# Altium PCB RemoteCar_V1.0.PcbDoc
Units mil, origin at the board's own origin, x right, y up, seen from the top; angles counter-clockwise.
Board outline 3818.9 x 2283.46 mil, 2 copper layers (Top Layer, Bottom Layer); 61 components, 56 nets, 230 pads, 12 vias.
Unrouted connection lines stored in the file: 66.
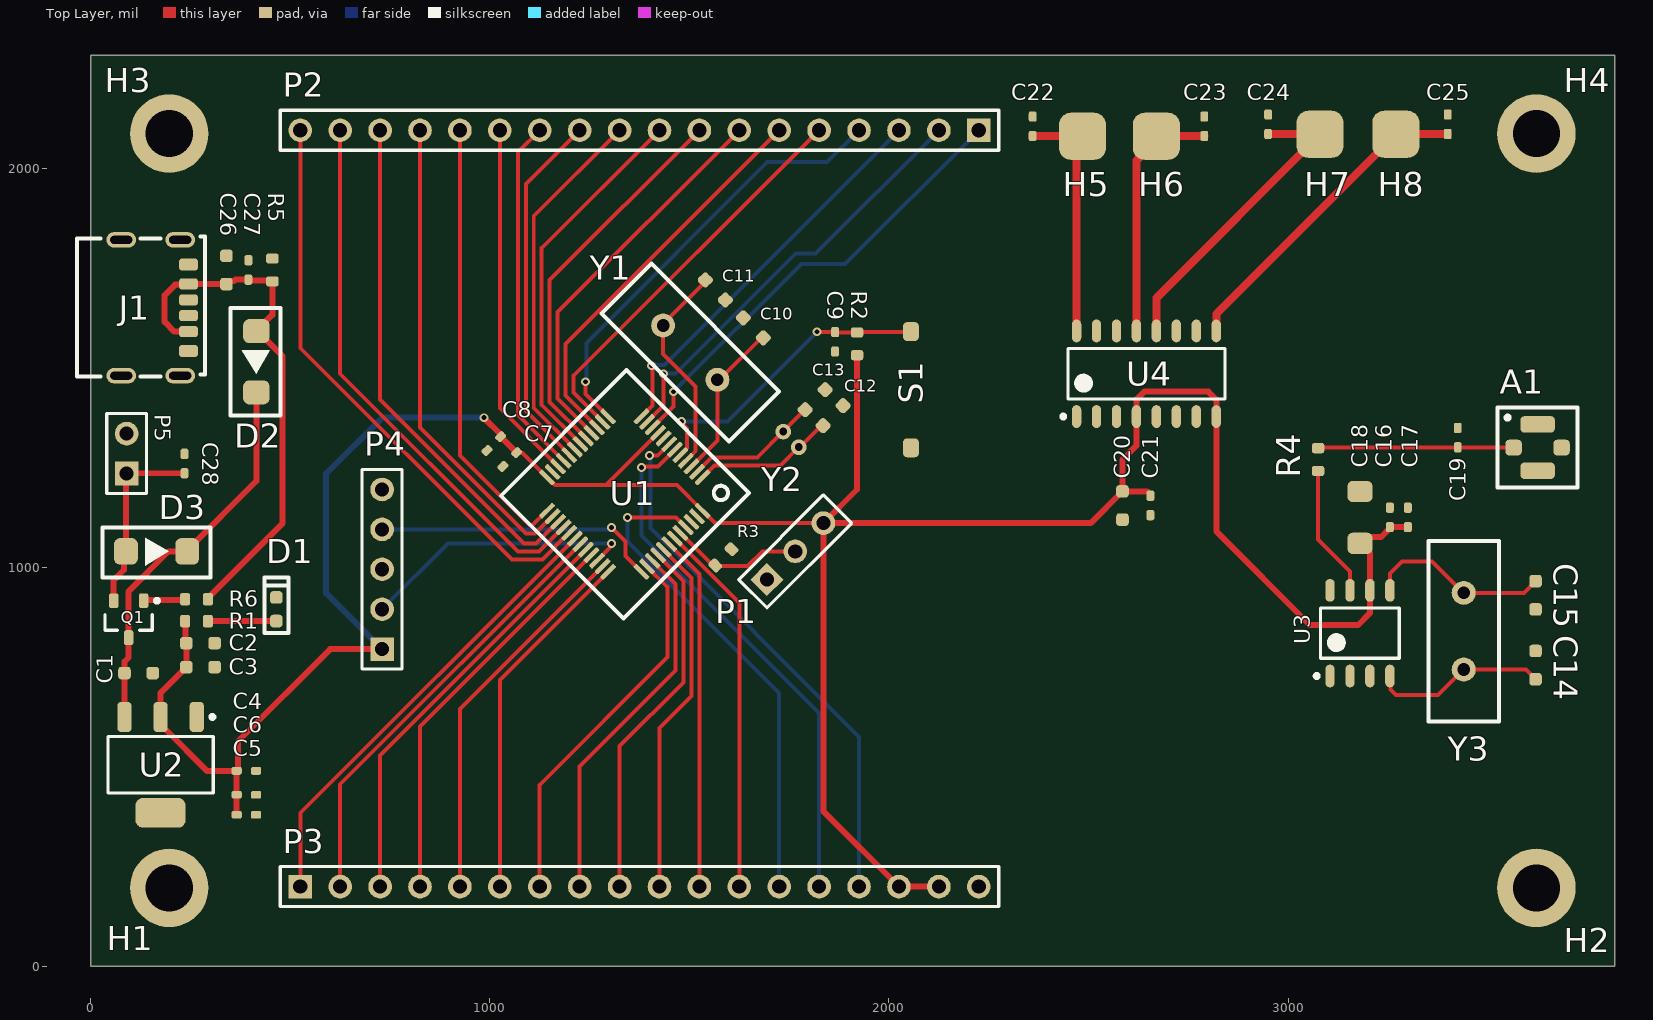
[diagram p0: Top Layer view]
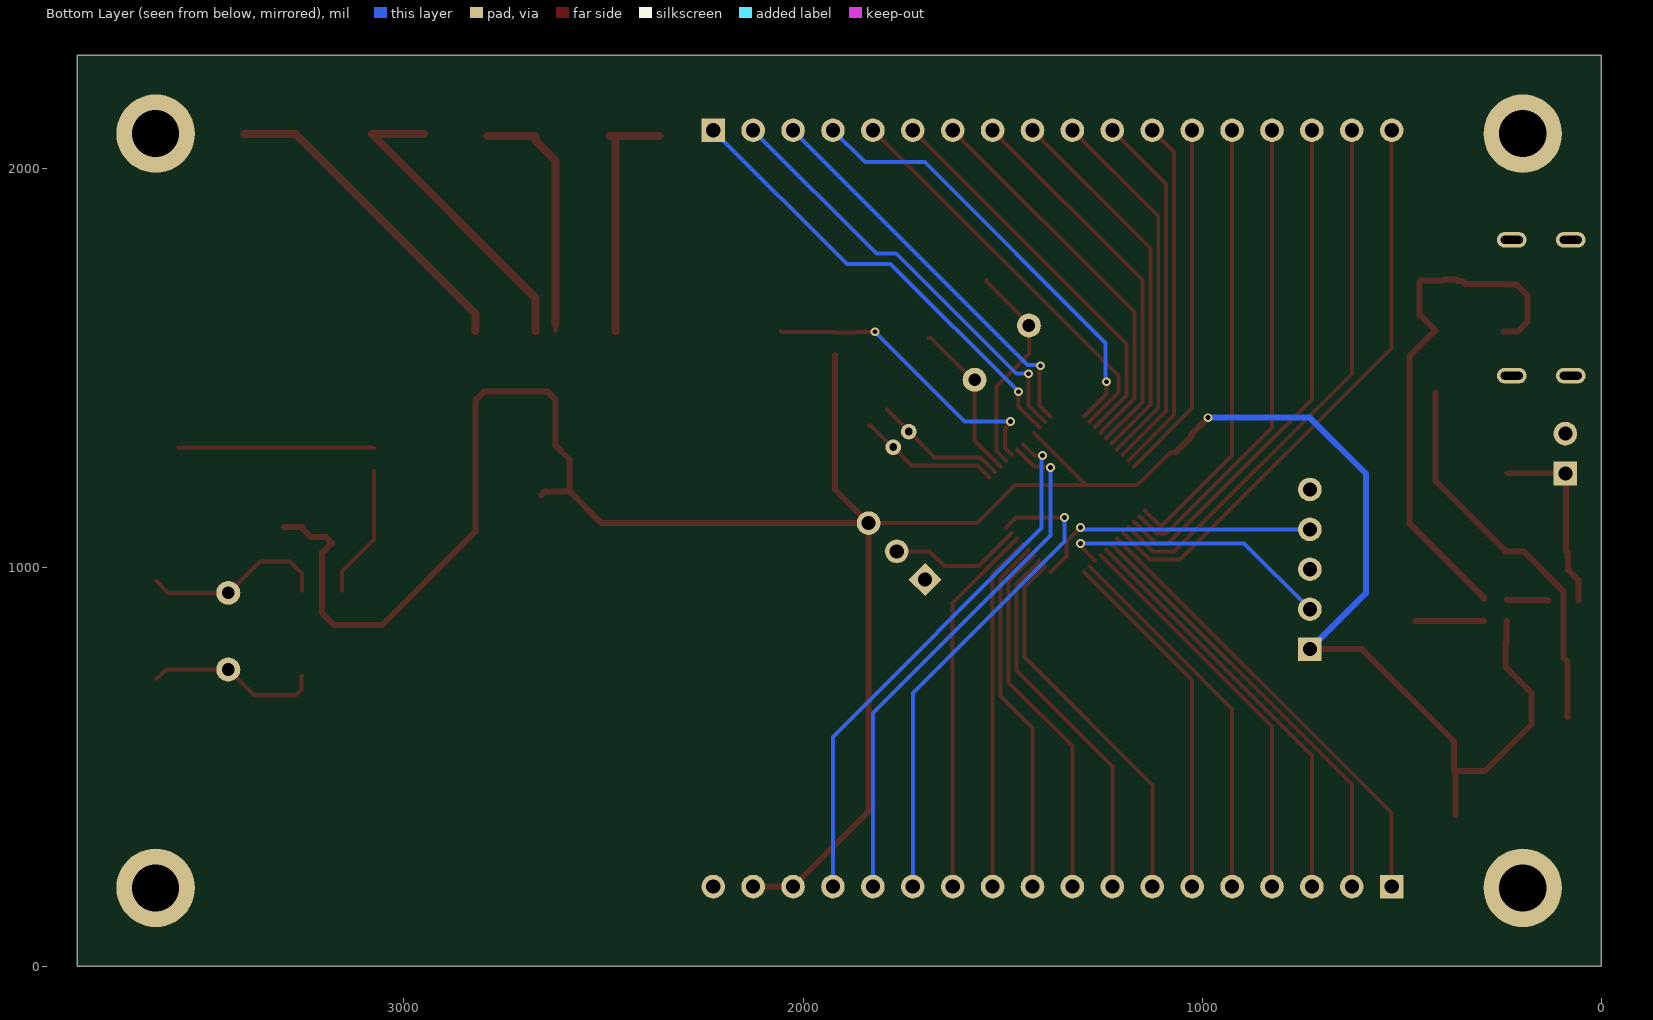
[diagram p1: Bottom Layer view, seen from below]
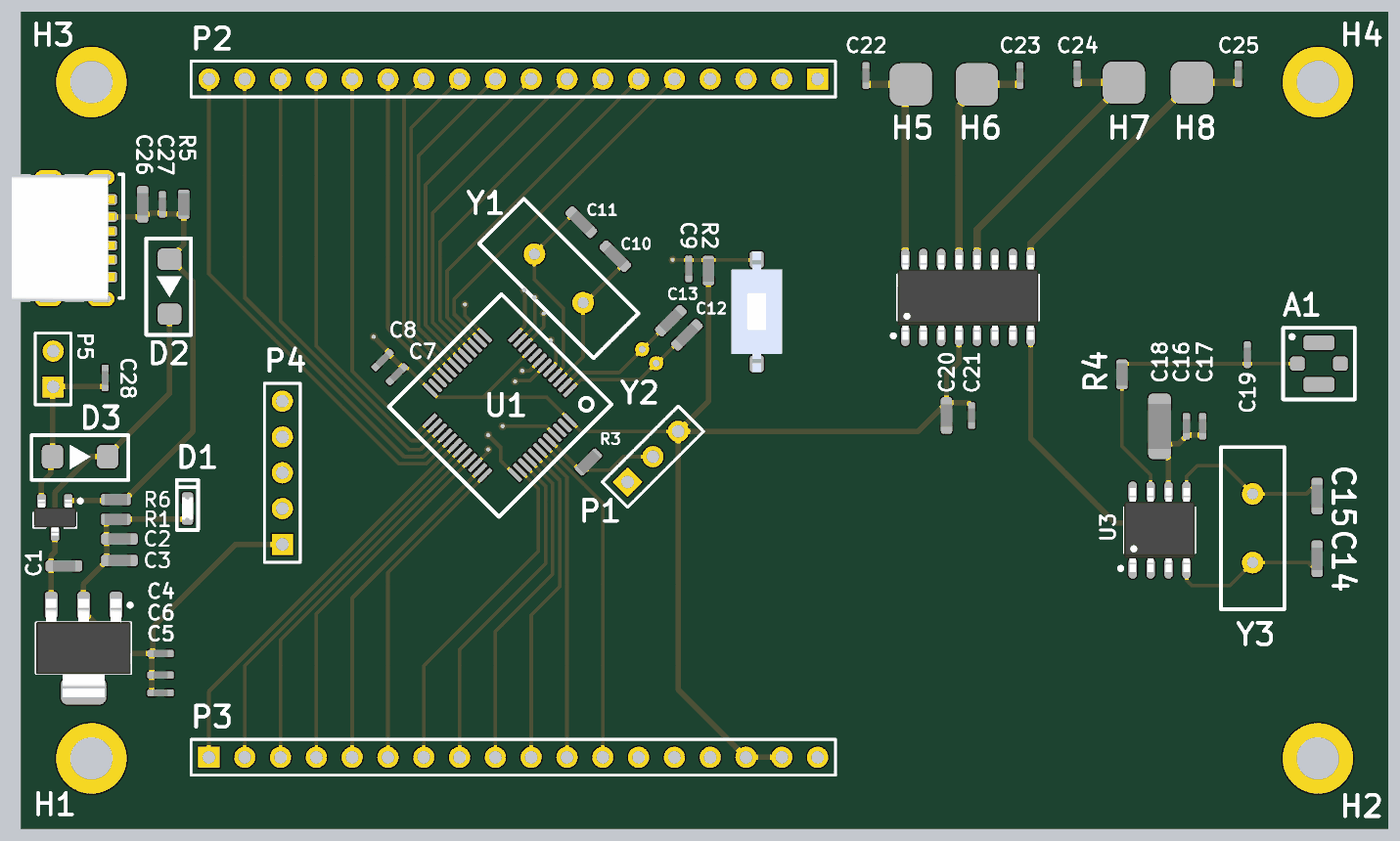
[diagram p2: 3D render of the assembled board from above, using the file's embedded part models]

## Layer stack, top to bottom
Top Solder: solder mask 0.4, Solder Resist, Dk 3.5
Top Layer: signal copper 1.4
Dielectric 1: dielectric 12.6, FR-4, Dk 4.8
Bottom Layer: signal copper 1.4
Bottom Solder: solder mask 0.4, Solder Resist, Dk 3.5

## Board outline
0,0 0,2283.46 3818.9,2283.46 3818.9,0

## Design rules (kind name [scope] priority, off if disabled: settings)
Clearance [All] p1: gap=6 ignorepadtopadclearanceinfootprint=FALSE
HoleSize [All] p1: absolutevalues=TRUE maxlimit=500 minlimit=1 maxpercent=80.000 minpercent=20.000
MinimumSolderMaskSliver [All] p1: minsoldermaskwidth=0
PlaneConnect [All] p1: planeconnectstyle=Direct reliefexpansion=20 reliefentries=4 reliefconductorwidth=10 reliefairgap=10
PolygonConnect [All] p1: connectstyle=Relief reliefconductorwidth=10 reliefentries=4 polygonreliefangle="90 Angle" airgapwidth=10
RoutingVias [All] p1: holewidth=12 width=22 viastyle="Through Hole" minholewidth=12 minwidth=22 maxholewidth=12 maxwidth=22
SolderMaskExpansion [All] p1: expansion=4 istentingtop=FALSE
Width [InNetClass('PWR')] p1: maxlimit=20 minlimit=10 preferedwidth=15
27 further rules are at their usual default settings.

## Classes and differential pairs
net class PWR: 3V3 GND NetD1_1 NetQ1_1 VBAT VBUS VIN

## Components (designator, comment, footprint, x,y, rotation, side; value= is the part's Value field where it differs from the comment)
A1 "ANT" IPEX1 3625,1300 r270 top
C1 "10uF" CAP-0603 120,735 r180 top
C2 "10uF" CAP-0603 275,810 r180 top
C3 "4.7uF" CAP-0603 275,750 r180 top
C4 "0.1uF" CAP-0402 390,490 r180 top
C5 "0.1uF" CAP-0402 390,380 r180 top
C6 "0.1uF" CAP-0402 390,430 r180 top
C7 "1uF" CAP-0402 1050,1270 r225 top
C8 "10nF" CAP-0402 1010,1310 r225 top
C9 "0.1uF" CAP-0402 1865,1565 r270 top
C10 "20pF" CAP-0603 1660,1600 r135 top
C11 "20pF" CAP-0603 1565,1695 r315 top
C12 "12pF" CAP-0603 1860,1380 r45 top
C13 "12pF" CAP-0603 1815,1420 r45 top
C14 "20pF" CAP-0603 3620,755 r90 top
C15 "20pF" CAP-0603 3620,930 r90 top
C16 "10nF" CAP-0402 3255,1125 r90 top
C17 "1nF" CAP-0402 3300,1125 r90 top
C18 "100uF" CAP-1206 3180,1125 r90 top
C19 "0.75pF" CAP-0402 3425,1325 r270 top
C20 "10uF" CAP-0603 2585,1155 r270 top
C21 "0.1uF" CAP-0402 2655,1155 r270 top
C22 "0.1uF" CAP-0402 2360,2105 r270 top
C23 "0.1uF" CAP-0402 2790,2105 r270 top
C24 "0.1uF" CAP-0402 2950,2110 r90 top
C25 "0.1uF" CAP-0402 3400,2110 r270 top
C26 "10uF" CAP-0603 340,1745 r90 top
C27 "0.1uF" CAP-0402 395,1745 r90 top
C28 "0.1uF" CAP-0402 235,1260 r90 top
D1 "LED" LED-0603 465,895 r90 top
D2 "1N5819" DO-214AC 415,1515 r270 top
D3 "1N5819" DO-214AC 165,1040 r0 top
H1 "HOLE" HOLE#1 238.94,196.22 r0 top
H2 "HOLE" HOLE#2 3483.94,216.22 r0 top
H3 "HOLE" HOLE#3 223.94,1941.22 r0 top
H4 "HOLE" HOLE#4 3473.94,1946.22 r0 top
H5 "MOTOR_PAD" MOTOR_PAD 2485,2080 r0 top
H6 "MOTOR_PAD" MOTOR_PAD 2670,2080 r0 top
H7 "MOTOR_PAD" MOTOR_PAD 3080,2085 r0 top
H8 "MOTOR_PAD" MOTOR_PAD 3270,2085 r0 top
J1 "USB-Type-C-6P" USB-Type-C-6P 160.75,1650.32 r270 top
P1 "Header 3" HDR1X3 1694.29,969.29 r45 top
P2 "Header 18" HDR1X18 2225,2095 r180 top
P3 "Header 18" HDR1X18 525,200 r0 top
P4 "Header 5" HDR1X5 730,795 r90 top
P5 "Header 2" HDR1X2 90,1235 r90 top
Q1 "AO3401A" SOT95P240X115-3N 95,870 r270 top
R1 "1K" RES-0603 265,865 r180 top
R2 "10K" RES-0603 1920,1560 r270 top
R3 "100K" RES-0603 1585,1025 r225 top
R4 "1K" RES-0603 3075,1270 r90 top
R5 "100K" RES-0603 455,1745 r90 top
R6 "4.7K" RES-0603 265,920 r180 top
S1 "SPSD-2Pins" TS-1101-X-X 2055,1445 r90 top
U1 "GD32E231C8T6" LQFP-48 1532.99,1225.27 r225 top
U2 "AMS1117-3.3V" SOT230P700X180-4N 175,505 r270 top
U3 "CI24R1" TSOP127P600X145-8N 3180,835 r90 top
U4 "TC1508S" SOP127P600X180-16N 2645,1485 r90 top
Y1 "8MHz" HC-49S 1502.07,1537.93 r135 top
Y2 "32.768kHz" DT-26 1773.97,1301.03 r135 top
Y3 "16MHz" HC-49S 3440,840 r90 top

## Footprints (in the part's own frame and the unit in brackets; to place one, negate y for a bottom-side part, rotate by r counter-clockwise, add the part's x,y. Pads: shape width x height; smd on the part's side, far side on the other; paste and mask are expansions set on the pad)
CAP-0402 [mm]
  rrect50% 0.65x0.5 smd: 1(-0.618,0) 2(0.618,0)
  body extent -0.5,-0.25 0.5,0.25, height 0.5
CAP-0603 [mm]
  rrect50% 0.8x0.8 smd: 1(-0.9,0) 2(0.9,0)
  body extent -0.8,-0.4 0.8,0.4, height 0.5
CAP-1206 [mm]
  rrect50% 1.35x1.6 smd: 1(-1.648,0) 2(1.649,0)
  body extent -1.6,-0.8 1.6,0.8, height 0.85
DO-214AC [mm]
  rrect50% 1.52x1.68 smd: 1(-1.95,0) 2(1.95,0)
  silkscreen extent -3.43,-1.65 3.43,1.52
DT-26 [mm]
  round 1 hole 0.5: 1(0,0) 2(1.4,0)
HC-49S [mil]
  round 60 hole 31.5: 1(-96.06,0) 2(96.06,0)
  silkscreen extent -226,-89 226,89
HDR1X2 [mm] "Connector; Header; 2 Position"
  rect 1.5x1.5 hole 0.9: 1(0,0)
  round 1.5 hole 0.9: 2(2.54,0)
  silkscreen extent -1.27,-1.27 3.81,1.27
HDR1X3 [mm] "Connector; Header; 3 Position"
  rect 1.5x1.5 hole 0.9: 1(0,0)
  round 1.5 hole 0.9: 2(2.54,0) 3(5.08,0)
  silkscreen extent -1.27,-1.27 6.35,1.27
HDR1X5 [mm] "Connector; Header; 5 Position"
  rect 1.5x1.5 hole 0.9: 1(0,0)
  round 1.5 hole 0.9: 2(2.54,0) 3(5.08,0) 4(7.62,0) 5(10.16,0)
  silkscreen extent -1.27,-1.27 11.43,1.27
HDR1X18 [mm] "Connector; Header; 18 Position"
  rect 1.5x1.5 hole 0.9: 1(0,0)
  round 1.5 hole 0.9: 2(2.54,0) 3(5.08,0) 4(7.62,0) 5(10.16,0) 6(12.7,0) 7(15.24,0) 8(17.78,0) 9(20.32,0) 10(22.86,0) 11(25.4,0) 12(27.94,0) 13(30.48,0) 14(33.02,0) 15(35.56,0) 16(38.1,0) 17(40.64,0) 18(43.18,0)
  silkscreen extent -1.27,-1.27 44.45,1.27
HOLE#1 [mm]
  round 5 hole 3: 1(-1.069,0.016)
HOLE#2 [mm]
  round 5 hole 3: 1(3.508,-0.492)
HOLE#3 [mm]
  round 5 hole 3: 1(-0.688,3.693)
HOLE#4 [mm]
  round 5 hole 3: 1(3.762,3.566)
IPEX1 [mm]
  rrect50% 1x1.05 smd: 1(0,-1.525) 3(0,1.525)
  rrect50% 1.05x2.2 smd: 2(1.475,0) 4(-1.475,0)
  silkscreen extent -2.54,-2.54 2.54,2.54
LED-0603 [mm]
  rrect50% 0.8x0.8 smd: 1(-0.75,0) 2(0.75,0)
  silkscreen extent -1.52,-0.76 2.03,0.76, body extent -0.8,-0.4 0.8,0.4, height 0.6
LQFP-48 [mm]
  rrect50% 1.2x0.3 smd: 1(0,0) 2(0,-0.5) 3(0,-1) 4(0,-1.5) 5(0,-2) 6(0,-2.5) 7(0,-3) 8(0,-3.5) 9(0,-4) 10(0,-4.5) 11(0,-5) 12(0,-5.5) 25(8.5,-5.5) 26(8.5,-5) 27(8.5,-4.5) 28(8.5,-4) 29(8.5,-3.5) 30(8.5,-3) 31(8.5,-2.5) 32(8.5,-2) 33(8.5,-1.5) 34(8.5,-1) 35(8.5,-0.5) 36(8.5,0)
  rrect50% 0.3x1.2 smd: 13(1.5,-7) 14(2,-7) 15(2.5,-7) 16(3,-7) 17(3.5,-7) 18(4,-7) 19(4.5,-7) 20(5,-7) 21(5.5,-7) 22(6,-7) 23(6.5,-7) 24(7,-7) 37(7,1.5) 37(7,1.5) 38(6.5,1.5) 39(6,1.5) 40(5.5,1.5) 41(5,1.5) 42(4.5,1.5) 43(4,1.5) 44(3.5,1.5) 45(3,1.5) 46(2.5,1.5) 47(2,1.5) 48(1.5,1.5)
  silkscreen extent -1.4,-8.25 9.91,2.79
MOTOR_PAD [mm]
  rrect50% 3x3 smd: 1(0,0)
RES-0603 [mm]
  rrect50% 0.65x0.8 smd: 1(-0.725,0) 2(0.725,0)
  body extent -0.8,-0.4 0.8,0.4, height 0.45
SOP127P600X180-16N [mm] "SOP, 16-Leads, Body 9.90x3.90mm, Pitch 1.27mm, IPC Medium Density"
  oval 1.45x0.6 smd: 1(-2.725,4.445) 2(-2.725,3.175) 3(-2.725,1.905) 4(-2.725,0.635) 5(-2.725,-0.635) 6(-2.725,-1.905) 7(-2.725,-3.175) 8(-2.725,-4.445) 9(2.725,-4.445) 10(2.725,-3.175) 11(2.725,-1.905) 12(2.725,-0.635) 13(2.725,0.635) 14(2.725,1.905) 15(2.725,3.175) 16(2.725,4.445)
  silkscreen extent -2.85,-5 1.6,5.42, body extent -3,-5 3,5, height 1.8
SOT95P240X115-3N [mm] "SOT23, 3-Leads, Body 2.90x2.40mm, Pitch 0.95mm, IPC Medium Density"
  rrect50% 0.95x0.6 smd: 1(-1.175,0.95) 2(-1.175,-0.95) 3(1.175,0)
  silkscreen extent -1.3,-1.5 0.7,1.93, body extent -1.28,-1.5 1.28,1.5, height 1.15
SOT230P700X180-4N [mm] "SOT223, 4-Leads, Body 6.50x7.00mm (avg), Pitch 2.30mm, IPC Medium Density"
  rrect50% 1.9x0.9 smd: 1(-3.05,2.3) 2(-3.05,0) 3(-3.05,-2.3)
  rrect50% 1.9x3.2 smd: 4(3.05,0)
  silkscreen extent -3.17,-3.35 1.8,3.43, body extent -3.5,-3.35 3.5,3.35, height 1.8
TS-1101-X-X [mm]
  rrect50% 1.2x1 smd: 1(-3.7,0) 2(3.7,0)
  body extent -4.3,-1.8 4.3,1.8, height 2.5
TSOP127P600X145-8N [mm] "TSOP, 8-Leads, Body 4.90x3.90mm, Pitch 1.27mm, IPC Medium Density"
  oval 1.45x0.6 smd: 1(-2.725,1.905) 2(-2.725,0.635) 3(-2.725,-0.635) 4(-2.725,-1.905) 5(2.725,-1.905) 6(2.725,-0.635) 7(2.725,0.635) 8(2.725,1.905)
  silkscreen extent -2.85,-2.5 1.6,2.88, body extent -3,-2.5 3,2.5, height 1.45
USB-Type-C-6P [mm]
  rrect50% 0.75x1.2 smd: 1(-2.75,2.14) 6(2.75,2.14)
  rrect50% 0.7x1.2 smd: 2(-1.52,2.14) 3(-0.5,2.14) 4(0.5,2.14) 5(1.52,2.14)
  oval 1x1.9 hole 0.5 slot 1.4 at 90 deg: 7(-4.32,1.61) 8(4.32,1.61) 9(-4.32,-2.14) 10(4.32,-2.14)
  silkscreen extent -4.53,-4.95 4.36,3.18, body extent -4.47,-4.75 4.47,2.6, height 3.17

## Part data
C1 C2 C3 C4 C5 C6 C7 C8 C9 C10 C11 C12 C13 C14 C15 C16 C17 C18 C19 C20 C21 C22 C23 C24 C25 C26 C27 C28: library part Capacitor
D2 D3: library part "Diode Schottky"
P1: "Header, 3-Pin", LatestRevisionDate=17-Jul-2002, LatestRevisionNote="Re-released for DXP Platform.", Publisher="Altium Limited"
P2 P3: "Header, 18-Pin", LatestRevisionDate=17-Jul-2002, LatestRevisionNote="Re-released for DXP Platform.", Publisher="Altium Limited"
P4: "Header, 5-Pin", LatestRevisionDate=17-Jul-2002, LatestRevisionNote="Re-released for DXP Platform.", Publisher="Altium Limited"
P5: "Header, 2-Pin", LatestRevisionDate=17-Jul-2002, LatestRevisionNote="Re-released for DXP Platform.", Publisher="Altium Limited"
Q1: library part "P-Channel MOSFET"
R1 R2 R3 R4 R5 R6: library part Resistor
S1: library part "SPSD 2Pins"
Y1 Y2 Y3: library part "Crystal 2P"

## Via types
v1: diameter 22, hole 12, Top Layer to Bottom Layer, tented both sides, 12 vias

## Nets (pads, with @x,y where several pads share a name; then routed paths per layer and width w, separated by ;. In a path a pad name is that pad's centre, name@x,y a point inside that pad or via, vN(x,y) a via of type N, cw(c..) or ccw(c..) an arc to the next point about the centre after c; other vN are vias at no path point)
3V3: C2.2 C3.2 C4.2 C5.2 C6.2 C7.1 C8.1 C16.1 C17.1 C18.1 C20.1 C21.1 P1.3 P3.16 P3.17 P4.1 R1.2 R2.2 U1.9 U1.24 U1.48 U2.2 U3.6 U4.4 U4.8 | length 7280.2
  Top Layer w10: C7.1 1069.29,1289.29 1076.14,1289.29 1078.74,1286.69 1081.82,1286.69 U1.24 ; U1.24@1143.64,1225.27 1162.87,1206.04 1291.04,1206.04 ; U1.9 1291.04,1206.04 ; P1.3 1564.03,1110.71 U1.48 1468.71,1206.04 1291.04,1206.04
  Top Layer w15: R1.2 238.01,863.44 238.01,811.56 C2.2 C3.2 175,685.43 175,606.13 185.95,595.18 291.13,490 C4.2 C6.2 C5.2 ; C4.2@368.62,490 368.62,563.62 600,795 P4.1 ; v1(985,1375) 1028.34,1331.66 C8.1@1028.34,1328.34 ; C8.1 C7.1 ; R2.2 1920,1195 P1.3 ; P3.17 P3.16 1835.71,389.29 P1.3 ; C21.1 2655,1182.28 2646.85,1190.43 C20.1 ; C17.1 C16.1 3255,1097.72 3232.88,1075.6 3195.5,1075.6 C18.1 3181.79,1060.1 3205,1036.89 U3.6 3205,885 3175,855 3055,855 2820,1090 U4.8 2820,1420 2800,1440 2640,1440 2620,1420 U4.4 2620,1305 2585,1270 C20.1 ; P1.3 2505.28,1110.71 C20.1
  Bottom Layer w15: P4.1 590,935 590,1235 730,1375 v1(985,1375)
BOOT0: P1.2 R3.2 U1.44 | length 337.7
  Top Layer w10: U1.44 1558.57,1004.82 R3.2 1566.9,1002.73 1645.58,1002.73 1682.85,1040 P1.2
GND: A1.2 A1.3 A1.4 C1.1 C2.1 C3.1 C4.1 C5.1 C6.1 C7.2 C8.2 C9.2 C10.2 C11.2 C12.2 C13.2 C14.2 C15.1 C16.2 C17.2 C18.2 C19.1 C20.2 C21.2 C22.1 C23.1 C24.2 C25.1 C26.2 C27.2 C28.2 D1.2 H1.1 H2.1 H3.1 H4.1 J1.1 J1.6 J1.7 J1.8 J1.9 J1.10 P1.1 P3.18 P4.3 P5.2 R3.1 R5.2 S1.1 U1.8 U1.23 U1.46 U1.47 U2.1 U3.8 U4.10 U4.11 U4.14 U4.15
INNB: P3.15 U1.7 | length 1358.9
  Top Layer w10: v1(1400,1280) 1420.68,1280 U1.7
  Bottom Layer w10: v1(1400,1280) 1402,1278 1402,1098 1925,575 P3.15
INPB: P3.14 U1.6 | length 1336.3
  Top Layer w10: v1(1380,1250) 1382.3,1252.3 1420.81,1252.3 U1.6
  Bottom Layer w10: v1(1380,1250) 1380,1080 1825,635 P3.14
NetA1_1: A1.1 C19.2 R4.2 | length 491.1
  Top Layer w10: R4.2 3076.06,1299.61 3423.94,1299.61 C19.2 3425.33,1300.33 3564.63,1300.33 A1.1
NetC14_1: C14.1 U3.4 Y3.1 | length 440.5
  Top Layer w10: U3.4 3255.97,726.75 3255.97,694.03 3270,680 3376.06,680 Y3.1 3595.63,743.94 C14.1
NetC15_2: C15.2 U3.5 Y3.2 | length 465
  Top Layer w10: U3.5 3255,985 3285,1015 3361.06,1015 Y3.2 3590.63,936.06 C15.2
NetD1_1: D1.1 R1.1 | length 171.7
  Top Layer w15: R1.1 293.78,865.24 464.76,865.24 D1.1
NetQ1_1: Q1.1 R6.2 | length 105.6
  Top Layer w15: Q1.1 134.27,918.13 234.59,918.13 R6.2
NetR4_1: R4.1 U3.7 | length 332.3
  Top Layer w10: R4.1 3075,1070 3155,990 U3.7
NRST: C9.1 P4.5 R2.1 S1.2 U1.5 | length 766.5
  Top Layer w10: U1.5 1477.31,1282.23 1494.04,1298.97 1494.04,1347.71 1480,1361.75 v1(1480,1365) ; v1(1820,1590) 1820.33,1589.67 1864.67,1589.67 C9.1 1865.39,1588.94 1919.61,1588.94 R2.1 1921.06,1589.61 2053.94,1589.61 S1.2
  Bottom Layer w10: v1(1480,1365) 1595,1365 v1(1820,1590)
OSC32IN: C12.1 U1.1 Y2.1 | length 355.7
  Top Layer w10: U1.1 1562.71,1255 1727.95,1255 Y2.1 1777.5,1301.03 1831.42,1354.95 C12.1
OSC32OUT: C13.1 U1.2 Y2.2 | length 335.4
  Top Layer w10: U1.2 1554.87,1275 1670,1275 Y2.2 C13.1
OSCIN: C10.1 U1.3 Y1.1 | length 402.3
  Top Layer w10: U1.3 1570,1317.97 Y1.1 1575.05,1470 1680,1574.95 C10.1
OSCOUT: C11.1 U1.4 Y1.2 | length 540.2
  Top Layer w10: U1.4 1515,1290.81 1515,1453.28 1434.15,1534.13 1434.15,1610.06 1539.95,1715.85 C11.1
OUTA: C22.2 H5.1 U4.16 | length 619.2
  Top Layer w10: H5.1@2470,2065 H5.1 H5.1@2484.33,2080.67
  Top Layer w20: C22.2 H5.1@2484.33,2080.67 ; U4.16 H5.1@2470,2065
OUTB: C23.2 H6.1 U4.13 | length 628.7
  Top Layer w10: U4.13 U4.13@2620,1609.02 ; H6.1 H6.1@2670.67,2080.67
  Top Layer w20: U4.13@2620,1609.02 2620,2019.43 2670,2069.43 H6.1 ; H6.1@2670.67,2080.67 C23.2
OUTC: C24.1 H7.1 U4.12 | length 792.8
  Top Layer w10: H7.1@3079.33,2085.67 H7.1
  Top Layer w20: U4.12 2670,1675 H7.1 ; C24.1 H7.1@3079.33,2085.67
OUTD: C25.2 H8.1 U4.9 | length 809.4
  Top Layer w10: H8.1 H8.1@3270.67,2085.67
  Top Layer w20: U4.9 2820,1635 H8.1 ; H8.1@3270.67,2085.67 C25.2
PA0: P2.1 U1.10 | length 1147.6
  Top Layer w10: U1.10 1408.02,1350.55 1460,1402.53 v1(1460,1440)
  Bottom Layer w10: v1(1460,1440) 1780.25,1760.25 1890.25,1760.25 P2.1
PA1: P2.2 U1.11 | length 1080.3
  Top Layer w10: U1.11 1435,1405.68 v1(1435,1485)
  Bottom Layer w10: v1(1435,1485) 1465,1485 1766.45,1786.45 1816.45,1786.45 P2.2
PA2: P2.3 U1.12 | length 1003.2
  Top Layer w10: U1.12 1407.18,1405.7 1407.18,1502.82 v1(1405,1505)
  Bottom Layer w10: v1(1405,1505) 1407,1507 1437,1507 P2.3
PA3: P2.4 U1.13 | length 1111.6
  Top Layer w10: v1(1240,1465) 1240,1434.74 U1.13
  Bottom Layer w10: v1(1240,1465) 1242.3,1467.3 1242.3,1562.3 1695,2015 1845,2015 P2.4
PA4: P2.5 U1.14 | length 1015.3
  Top Layer w10: U1.14 1282.44,1365.75 1210,1438.19 1210,1480 P2.5
PA5: P2.6 U1.15 | length 998.6
  Top Layer w10: U1.15 1268.52,1351.83 1190,1430.35 1190,1560 P2.6
PA6: P2.7 U1.16 | length 981.9
  Top Layer w10: U1.16 1254.6,1337.91 1170,1422.51 1170,1640 P2.7
PA7: P2.8 U1.17 | length 965.2
  Top Layer w10: U1.17 1240.68,1323.99 1150,1414.67 1150,1720 P2.8
PA8: P2.18 U1.29 | length 1465.8
  Top Layer w10: P2.18 525,1550 1055,1020 1131.56,1020 1197.64,1086.08 U1.29
PA9: P3.1 U1.30 | length 1157.1
  Top Layer w10: P3.1 525,384.32 U1.30
PA10: P3.2 U1.31 | length 1107.5
  Top Layer w10: P3.2 625,456.48 U1.31
PA11: P3.3 U1.32 | length 1057.9
  Top Layer w10: P3.3 725,528.64 U1.32
PA12: P3.4 U1.33 | length 1008.3
  Top Layer w10: P3.4 825,600.81 U1.33
PA13: P4.2 U1.34 | length 702
  Top Layer w10: U1.34 1302.7,1050.67 1302.7,1057.7 v1(1305,1060)
  Bottom Layer w10: P4.2 895,1060 v1(1305,1060)
PA14: P4.4 U1.37 | length 719.4
  Top Layer w10: v1(1305,1100) 1340,1065 1340,1028.52 U1.37@1379.87,988.64
  Bottom Layer w10: P4.4 1296.75,1095 1301.75,1100 v1(1305,1100)
PA15: P3.7 U1.38 | length 956.3
  Top Layer w10: P3.7 1125,454.82 1445,774.82 1445,950.07 1393.79,1001.28 U1.38
PB0: P2.9 U1.18 | length 948.5
  Top Layer w10: U1.18 1226.76,1310.07 1130,1406.83 1130,1800 P2.9
PB1: P2.10 U1.19 | length 931.8
  Top Layer w10: U1.19 1212.84,1296.15 1110,1398.99 1110,1880 P2.10
PB2: P2.11 U1.20 | length 915.1
  Top Layer w10: U1.20 1198.92,1282.23 1090,1391.15 1090,1960 P2.11
PB3: P3.8 U1.39 U3.1 | length 939.6
  Top Layer w10: P3.8 1225,501.46 1465,741.46 1465,957.91 1407.71,1015.2 U1.39
PB4: P3.9 U1.40 U3.2 | length 922.9
  Top Layer w10: P3.9 1325,551.99 1485,711.99 1485,965.75 1421.63,1029.12 U1.40
PB5: P3.10 U1.41 U3.3 | length 906.2
  Top Layer w10: P3.10 1425,597.3 1505,677.3 1505,973.59 1435.55,1043.04 U1.41
PB6: P3.11 U1.42 U4.2 | length 889.5
  Top Layer w10: U1.42 1525,982.71 P3.11
PB7: P3.12 U1.43 U4.3 | length 939.1
  Top Layer w10: U1.43 1625,910.55 P3.12
PB8: P3.13 U1.45 U4.6 | length 1239
  Top Layer w10: v1(1345,1125) 1466.23,1125 U1.45
  Bottom Layer w10: v1(1345,1125) 1345,1065 1725,685 P3.13
PB10: P2.12 U1.21 U4.7 | length 898.4
  Top Layer w10: P2.12 1070,2040 1070,1382.03 U1.21
PB11: P2.13 U1.22 | length 902.4
  Top Layer w10: P2.13 1025,1399.19 U1.22
PB12: P2.14 U1.25 | length 1120.2
  Top Layer w10: P2.14 925,1280 1099.1,1105.9 1107.38,1105.9 U1.25
PB13: P2.15 U1.26 | length 1204.7
  Top Layer w10: P2.15 825,1350 1090,1085 1113.04,1085 1155.88,1127.84 U1.26
PB14: P2.16 U1.27 | length 1292.5
  Top Layer w10: P2.16 725,1420 1085,1060 1115.88,1060 1169.8,1113.92 U1.27
PB15: P2.17 U1.28 | length 1379.2
  Top Layer w10: P2.17 625,1485 1070,1040 1123.72,1040 1183.72,1100 U1.28
PF6: P3.5 U1.35 | length 950.6
  Top Layer w10: P3.5 925,645.13 U1.35
PF7: P3.6 U1.36 | length 901
  Top Layer w10: P3.6 1025,717.29 U1.36
VBAT: C28.1 D3.1 P5.1 Q1.2 | length 477.4
  Top Layer w15: Q1.2 57.6,967.6 83.22,993.22 83.22,1034.99 D3.1 88.23,1233.23 P5.1 90.67,1235.67 C28.1
VBUS: C26.1 C27.1 D2.1 J1.2 J1.5 R5.1 R6.1 | length 1344.2
  Top Layer w15: J1.5 209.53,1590.47 185,1615 185,1681.66 211.66,1708.32 243.16,1708.32 J1.2 245.3,1709.86 339.7,1709.86 C26.1 348.02,1717.58 359.57,1717.58 362.66,1720.67 C27.1 397.11,1718.56 452.89,1718.56 R5.1 455,1632.66 415,1592.66 D2.1 418.15,1591.77 480,1529.92 480,1109.41 293.54,922.95 R6.1
VIN: C1.2 D2.2 D3.2 Q1.3 U2.3 | length 977.3
  Top Layer w15: U2.3 84.51,625.14 84.51,734.94 C1.2 ; C1.2@84.57,735.2 84.64,735.27 84.64,763.63 95,774 Q1.3 95,940 195,1040 D3.2 241.77,1043.15 415,1216.38 D2.2
pads on no net: J1.3 J1.4 U2.4 U4.1 U4.5

## Silkscreen, mask and mechanical layers (free items; w line width, h text height)
Mechanical 1:
  the board outline again, w10